# Altium PCB PCB.PcbDoc
Units mil, origin at the board's own origin, x right, y up, seen from the top; angles counter-clockwise.
Board outline 7290 x 1555 mil, 2 copper layers (Top Layer, Bottom Layer); 33 components, 44 nets, 135 pads, 4 vias.
Unrouted connection lines stored in the file: 41.
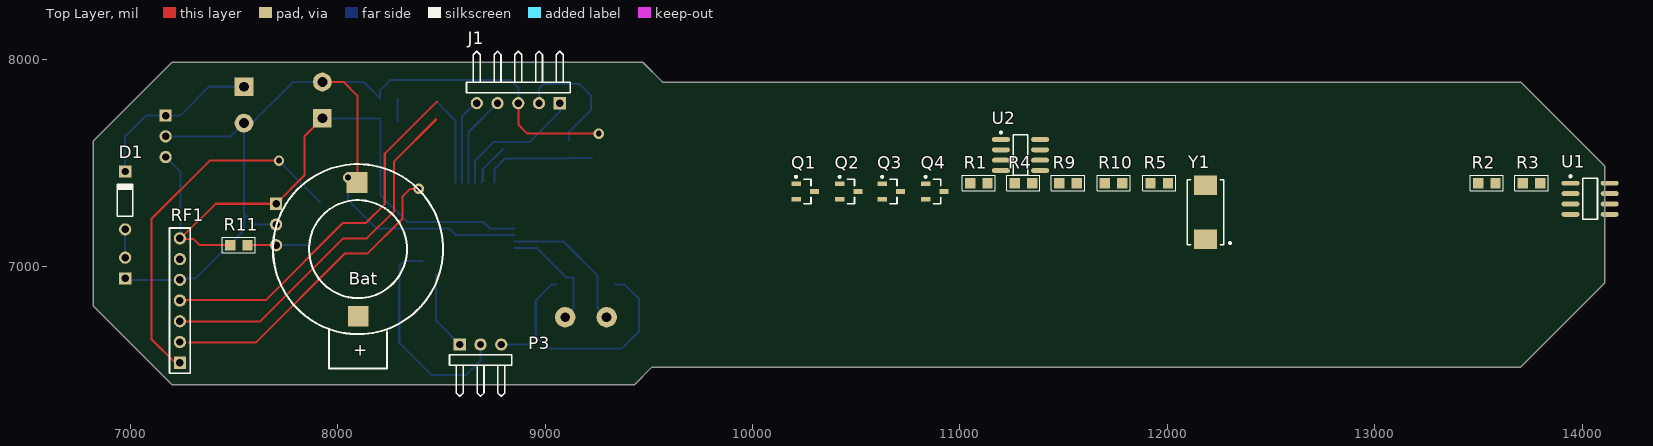
[diagram p0: Top Layer view]
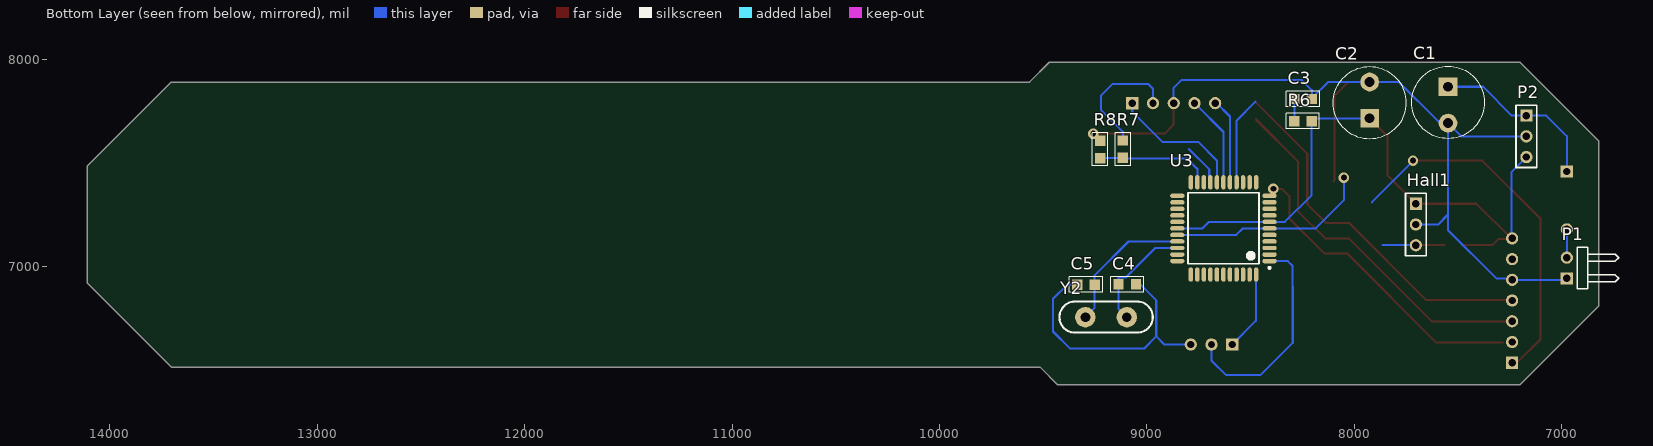
[diagram p1: Bottom Layer view, seen from below]

## Layer stack, top to bottom
Top Layer: signal copper 1.4
Dielectric: dielectric 12.6, FR-4, Dk 4.8
Bottom Layer: signal copper 1.4

## Board outline
6820,6810 7200,6430 9430,6430 9515,6515 13705,6515 14110,6920 14110,7485 13705,7890 9565,7890 9470,7985 7200,7985 6820,7605

## Design rules (kind name [scope] priority, off if disabled: settings)
Clearance [All] p1: gap=10
PolygonConnect [All] p1: connectstyle=Relief reliefconductorwidth=10 reliefentries=4 polygonreliefangle="90 Angle" airgapwidth=10
RoutingVias [All] p1: holewidth=28 width=50 viastyle="Through Hole" minholewidth=28 minwidth=50 maxholewidth=28 maxwidth=50
SilkscreenOverComponentPads [All] p1: minsilkscreentomaskgap=10
SolderMaskExpansion [All] p1: expansion=4
Width [All] p1: maxlimit=10 minlimit=10 preferedwidth=10
27 further rules are at their usual default settings.

## Components (designator, comment, footprint, x,y, rotation, side; value= is the part's Value field where it differs from the comment)
Bat "Battery" BATTERY 8097,6684 r90 top
C1 "Cap Pol3" "CAP POL 2" 7547,7867 r270 bottom
C2 "Cap Pol3" "CAP POL 2" 7925,7715 r90 bottom
C3 "Cap Semi" SM/C_0805 8204,7808 r0 bottom
C4 "Cap Semi" SM/C_0805 9052,6914 r0 bottom
C5 "Cap Semi" SM/C_0805 9335,6913 r180 bottom
D1 "Diode 1N4148" DO-35 6974,7319 r90 top
Hall1 "Header 3" HDR1X3 7702,7303 r270 bottom
J1 "Programming" HDR1X5H 9070,7788 r180 top
P1 "DC 12V" HDR1X2H 6974,6943 r90 bottom
P2 "7805" HDR1X3 7169,7728 r270 bottom
P3 "Header 3H" HDR1X3H 8588,6624 r0 top
Q1 "QNPN" SOT-23B_N 10254,7362 r0 top
Q2 "QNPN" SOT-23B_N 10464,7362 r0 top
Q3 "QNPN" SOT-23B_N 10669,7362 r0 top
Q4 "QNPN" SOT-23B_N 10879,7362 r0 top
R1 "Res Semi" SM/C_0805 11049,7402 r0 top
R2 "Res Semi" SM/C_0805 13499,7402 r0 top
R3 "Res Semi" SM/C_0805 13714,7402 r0 top
R4 "Res Semi" SM/C_0805 11264,7402 r0 top
R5 "Res Semi" SM/C_0805 11919,7402 r0 top
R6 "Res Semi" SM/C_0805 8289,7701 r180 bottom
R7 "Res Semi" SM/C_0805 9115,7524 r90 bottom
R8 "Res Semi" SM/C_0805 9225,7607 r270 bottom
R9 "Res Semi" SM/C_0805 11479,7402 r0 top
R10 "Res Semi" SM/C_0805 11699,7402 r0 top
R11 "Res Semi" SM/C_0805 7564,7103 r180 top
RF1 "RF Module" HDR1X7 7238,6536 r90 top
U1 "AT24C01BN-SP25-T" 8S1_N 14039,7327 r0 top
U2 "DS1307Z" SOIC8N_N 11292,7538 r0 top
U3 "PIC16F887-E/PT" TQFP-PT44_N 8630,7184 r0 bottom
Y1 "32,768KHz" CFPX-93 12184,7262 r90 top
Y2 "20MHz" CRYSTAL 9096,6756 r0 bottom

## Footprints (in the part's own frame and the unit in brackets; to place one, negate y for a bottom-side part, rotate by r counter-clockwise, add the part's x,y. Pads: shape width x height; smd on the part's side, far side on the other; paste and mask are expansions set on the pad)
8S1_N [mm] "SOIC, 8-Leads, Body 4.9x3.9mm, Pitch 1.27mm, IPC Medium Density"
  oval 2.2x0.6 smd: 1(-2.4,1.905) 2(-2.4,0.635) 3(-2.4,-0.635) 4(-2.4,-1.905) 5(2.4,-1.905) 6(2.4,-0.635) 7(2.4,0.635) 8(2.4,1.905)
  silkscreen extent -2.52,-2.5 0.9,2.88, body extent -2,-2.5 2,2.5, height 1.75
BATTERY [mil]
  rect 100x100 smd: 1(721,5) 2(76,-1)
  silkscreen extent -175,-410 810,410
"CAP POL 2" [mil]
  rect 90.53x90.53 hole 47.23: 1(0,0)
  round 90.53 hole 47.23: 2(175,0)
  silkscreen extent -100,-175 250,175
CFPX-93 [mm] "Surface Mount Quartz Crystal; Body 8.2 x 4.7 mm (LxW max)"
  rect 2.4x2.8 smd: 1(-3.3,0) 2(3.3,0)
  silkscreen extent -4,-3.14 4,2.25
CRYSTAL [mil]
  round 98.43 hole 47.23: 1(0,0) 2(200,0)
  silkscreen extent -125,-75 325,75
DO-35 [mm] "Diode, Axial; Body 3.8 x 1.9 mm (LxDia. max), Lead Dia. 0.53 mm (max)"
  round 1.5 hole 0.9: 1(-3.55,0)
  rect 1.5x1.5 hole 0.9: 2(3.55,0)
  silkscreen extent -1.95,-0.95 2.05,0.95
HDR1X2H [mm] "Connector; Header; 2 Position; Right Angle"
  rect 1.5x1.5 hole 0.9: 1(0,0)
  round 1.5 hole 0.9: 2(2.54,0)
  silkscreen extent -1.27,-6.35 3.81,-1.27
HDR1X3 [mm] "Connector; Header; 3 Position"
  rect 1.5x1.5 hole 0.9: 1(0,0)
  round 1.5 hole 0.9: 2(2.54,0) 3(5.08,0)
  silkscreen extent -1.27,-1.27 6.35,1.27
HDR1X3H [mm] "Connector; Header; 3 Position; Right Angle"
  rect 1.5x1.5 hole 0.9: 1(0,0)
  round 1.5 hole 0.9: 2(2.54,0) 3(5.08,0)
  silkscreen extent -1.27,-6.35 6.35,-1.27
HDR1X5H [mm] "Connector; Header; 5 Position; Right Angle"
  rect 1.5x1.5 hole 0.9: 1(0,0)
  round 1.5 hole 0.9: 2(2.54,0) 3(5.08,0) 4(7.62,0) 5(10.16,0)
  silkscreen extent -1.27,-6.35 11.43,-1.27
HDR1X7 [mm] "Connector; Header; 7 Position"
  rect 1.5x1.5 hole 0.9: 1(0,0)
  round 1.5 hole 0.9: 2(2.54,0) 3(5.08,0) 4(7.62,0) 5(10.16,0) 6(12.7,0) 7(15.24,0)
  silkscreen extent -1.27,-1.27 16.51,1.27
SM/C_0805 [mil]
  rect 50x50 smd: 1(0,0) 2(84,0)
  silkscreen extent -38,-38 122,38
SOIC8N_N [mm] "SOIC, 8-Leads, Body 4.9x3.9mm, Pitch 1.27mm, IPC Medium Density"
  oval 2.2x0.6 smd: 1(-2.4,1.905) 2(-2.4,0.635) 3(-2.4,-0.635) 4(-2.4,-1.905) 5(2.4,-1.905) 6(2.4,-0.635) 7(2.4,0.635) 8(2.4,1.905)
  silkscreen extent -2.52,-2.5 0.9,2.88, body extent -2,-2.5 2,2.5, height 1.75
SOT-23B_N [mm] "SOT23, 3-Leads, Body 2.9x1.3mm, Pitch 0.95mm, Lead Span 2.4mm, IPC Medium Density"
  rect 1.15x0.6 smd: 1(-1.125,0.95) 2(-1.125,-0.95) 3(1.125,0)
  silkscreen extent -1.25,-1.5 0.7,1.92, body extent -0.7,-1.5 0.7,1.5, height 1.14
TQFP-PT44_N [mm] "Thin QFP, 44-Leads, Body 10x10mm, Pitch 0.8mm, IPC Medium Density"
  oval 1.75x0.55 smd: 1(-5.65,4) 2(-5.65,3.2) 3(-5.65,2.4) 4(-5.65,1.6) 5(-5.65,0.8) 6(-5.65,0) 7(-5.65,-0.8) 8(-5.65,-1.6) 9(-5.65,-2.4) 10(-5.65,-3.2) 11(-5.65,-4) 23(5.65,-4) 24(5.65,-3.2) 25(5.65,-2.4) 26(5.65,-1.6) 27(5.65,-0.8) 28(5.65,0) 29(5.65,0.8) 30(5.65,1.6) 31(5.65,2.4) 32(5.65,3.2) 33(5.65,4)
  oval 0.55x1.75 smd: 12(-4,-5.65) 13(-3.2,-5.65) 14(-2.4,-5.65) 15(-1.6,-5.65) 16(-0.8,-5.65) 17(0,-5.65) 18(0.8,-5.65) 19(1.6,-5.65) 20(2.4,-5.65) 21(3.2,-5.65) 22(4,-5.65) 34(4,5.65) 35(3.2,5.65) 36(2.4,5.65) 37(1.6,5.65) 38(0.8,5.65) 39(0,5.65) 40(-0.8,5.65) 41(-1.6,5.65) 42(-2.4,5.65) 43(-3.2,5.65) 44(-4,5.65)
  silkscreen extent -5.77,-4.35 4.35,4.95, body extent -5,-5 5,5, height 1.2

## Part data
C1 C2: "Polarized Capacitor (Surface Mount)"
C3 C4 C5: "Capacitor (Semiconductor SIM Model)"
D1: "High Conductance Fast Diode"
Hall1: "Header, 3-Pin"
J1: library part "Header 5H", "Header, 5-Pin, Right Angle"
P1: library part "Header 2H", "Header, 2-Pin, Right Angle"
P2: library part "Header 3", "Header, 3-Pin"
P3: "Header, 3-Pin, Right Angle"
Q1 Q2 Q3 Q4: "NPN Bipolar Transistor"
R1 R2 R3 R4 R5 R6 R7 R8 R9 R10 R11: "Semiconductor Resistor"
RF1: library part "Header 7", "Header, 7-Pin"
U1: "1Kbit (128 x 8), 2-wire Bus Automotive Serial EEPROM with Write Protect, 2.5V, 8-Pin SOIC, Tape & Reel"
U2: "64 X 8 Serial Real-Time Clock"
U3: "Flash-Based, 8-Bit CMOS Microcontroller with nanoWatt Technology, 8K (x14-Bit words) Program Memory, 624 Bytes Data Memory, 35 I/O pins, 44-Pin TQFP, Standard VDD Range, Extended Temperature"
Y1: library part CFPX-93, "Surface Mount Quartz Crystal"
Y2: library part XTAL

## Via types
v1: diameter 50, hole 28, Top Layer to Bottom Layer, 4 vias

## Nets (pads, with @x,y where several pads share a name; then routed paths per layer and width w, separated by ;. In a path a pad name is that pad's centre, name@x,y a point inside that pad or via, vN(x,y) a via of type N, cw(c..) or ccw(c..) an arc to the next point about the centre after c; other vN are vias at no path point)
5V: C2.1 Hall1.1 J1.2 P2.3 R2.2 R3.2 R5.1 R6.2 R7.2 R11.2 RF1.7 U1.8 U2.8 U3.7 U3.28 | length 3673.2
  Top Layer w10: R11.2 7333,7103 7302.5,7133.5 7240.5,7133.5 7410,7303 Hall1.1 7839,7440 7839,7629 C2.1
  Bottom Layer w10: P2.3 7240,7457 RF1.7@7240,7136 ; C2.1 R6.2@8205,7715 ; R6.2 8205,7344 8333.5,7215.5 U3.7 8699.5,7215.5 8731,7184 U3.28 ; J1.2 8970,7857 8994,7881 9163,7881 9221,7823 9221,7757 9115,7651 R7.2
GND: Bat.1 C1.2 C2.2 C3.1 C4.1 C5.1 Hall1.2 J1.3 P1.1 P2.2 P3.3 Q1.3 Q2.3 Q3.3 Q4.3 R8.1 RF1.5 U1.1 U1.2 U1.3 U1.4 U1.7 U2.4 U3.6 U3.29 | length 6806.5
  Top Layer w10: C2.2 8028,7890 8094,7824 8094,7417 Bat.1@8100.32,7410.68 ; J1.3 8870,7685 8914,7641 v1(9258,7641)
  Bottom Layer w10: P1.1 6981,6936 RF1.5 ; P2.2 7483,7628 C1.2 ; RF1.5@7238,6943 7314,6943 7547,7176 7547,7251 ; Hall1.2 7595,7203 7547,7251 ; v1(8049,7429) 8049,7320 8185,7184 U3.6 8536,7184 8567.5,7152.5 U3.29 ; C3.1 C3.1@8204,7811 ; P3.3 8915,6624 8954,6663 ; J1.3 8870,7862 8833,7899 8252,7899 8204,7851 C3.1@8204,7811 ; C4.1 9031,6914 8954,6837 8954,6663 ; C5.1 9383,6913 9452,6844 9452,6687 9369,6604 9013,6604 8954,6663 ; 7547,7251 C1.2 ; C1.2 7558,7703 7597,7703 7784,7890 C2.2 8125,7890 C3.1@8204,7811
LED0: U3.38
LED1: U3.39
LED2: U3.40
LED3: U3.41
LED4: U3.2
LED5: U3.3
LED6: U3.4
LED7: U3.5
LED_G0: R1.2 U3.19 | length 203.6
  Bottom Layer w10: U3.19 8698.66,7412.11 8698.66,7468.66 8797,7567
LED_G1: R4.2 U3.25
LED_G2: R9.2 U3.26
LED_G3: R10.2 U3.27
MCLR: J1.1 U3.18 | length 652.7
  Bottom Layer w10: U3.18 8661.5,7511.5 8751,7601 8925,7601 9070,7746 J1.1
NetBAT_2: Bat.2 U2.3
NetC1_1: C1.1 D1.2 P2.1 | length 841.8
  Bottom Layer w10: D1.2 6974,7629 7073,7728 P2.1 7239,7728 7378,7867 C1.1
NetC3_2: C3.2 R6.1 | length 107.4
  Bottom Layer w10: C3.2 8288,7702 R6.1
NetC4_2: C4.2 U3.31 Y2.1 | length 550.2
  Bottom Layer w10: U3.31 8959.49,7089.51 9102,6947 9136,6947 C4.2 9136,6796 Y2.1
NetC5_2: C5.2 U3.30 Y2.2 | length 686.7
  Bottom Layer w10: U3.30 9087.99,7121.01 9251,6958 C5.2 9251,6801 Y2.2
NetD1_1: D1.1 P1.2 | length 136.2
  Bottom Layer w10: P1.2 D1.1
NetLED1_3: Q1.1
NetLED5_3: Q2.1
NetLED9_3: Q3.1
NetLED13_3: Q4.1
NetQ1_2: Q1.2 R1.1
NetQ2_2: Q2.2 R4.1
NetQ3_2: Q3.2 R9.1
NetQ4_2: Q4.2 R10.1
NetRF1_1: RF1.1 U3.10 | length 1778.4
  Top Layer w10: RF1.1 7215,6536 7101,6650 7101,7231 7381,7511 v1(7716,7511)
  Bottom Layer w10: v1@7714.5,7509.5 7914.02,7309.98
NetRF1_2: RF1.2 U3.11 | length 1478
  Top Layer w10: 7281,6633 7603,6633 8032,7062 8142,7062 8312,7232 8312,7339 8348,7375 v1(8389,7375)
NetRF1_3: RF1.3 U3.14 | length 1781.6
  Top Layer w10: RF1.3 7625,6736 8025,7136 8140,7136 8271,7267 8271,7507 8473,7709 8473,7712
NetRF1_4: RF1.4 U3.15 | length 2204
  Top Layer w10: RF1.4@7238,6838 7652,6838 8024,7210 8135,7210 8226,7301 8226,7544 8477,7795
  Bottom Layer w10: 8476,7795 8567.01,7703.99 U3.15
NetU2_1: U2.1 Y1.1
NetU2_2: U2.2 Y1.2
PGC: J1.4 U3.17 | length 441.6
  Bottom Layer w10: U3.17 8630,7649 8766.5,7785.5 J1.4@8766.5,7791.5
PGD: J1.5 U3.16 | length 413.2
  Bottom Layer w10: U3.16 8598.5,7723.5 J1.5@8666.5,7791.5
RX: P3.2 U3.1 | length 1057.3
  Bottom Layer w10: U3.1 8319.52,7026.52 8297,7004 8297,6903 8296,6904 8296,6632 8452,6476 8617,6476 8688,6547 P3.2
SCL: R2.1 U1.6 U2.6 U3.37
SDA: R3.1 U1.5 U2.5 U3.42
SIGHALL: Hall1.3 R11.1 U3.36 | length 298
  Top Layer w10: R11.1 Hall1.3
  Bottom Layer w10: Hall1.3 7862,7103
SQW: R5.2 U2.7 U3.8
TX: P3.1 U3.44 | length 385.4
  Bottom Layer w10: U3.44 8472.52,6851.48 8474,6850 8474,6738 P3.1
VIN+: R7.1 R8.2 U3.21 | length 555.5
  Bottom Layer w10: U3.21 8755.98,7473.02 8758.02,7473.02 8806,7521 R7.1@9115,7521 ; R7.1@9115,7523 R8.2
pads on no net: RF1.6 U3.9 U3.12 U3.13 U3.20 U3.22 U3.23 U3.24 U3.32 U3.33 U3.34 U3.35 U3.43

## Silkscreen, mask and mechanical layers (free items; w line width, h text height)
Top Overlay:
  text "+" at 8073,6569 h60